# Allegro board Node1.brd
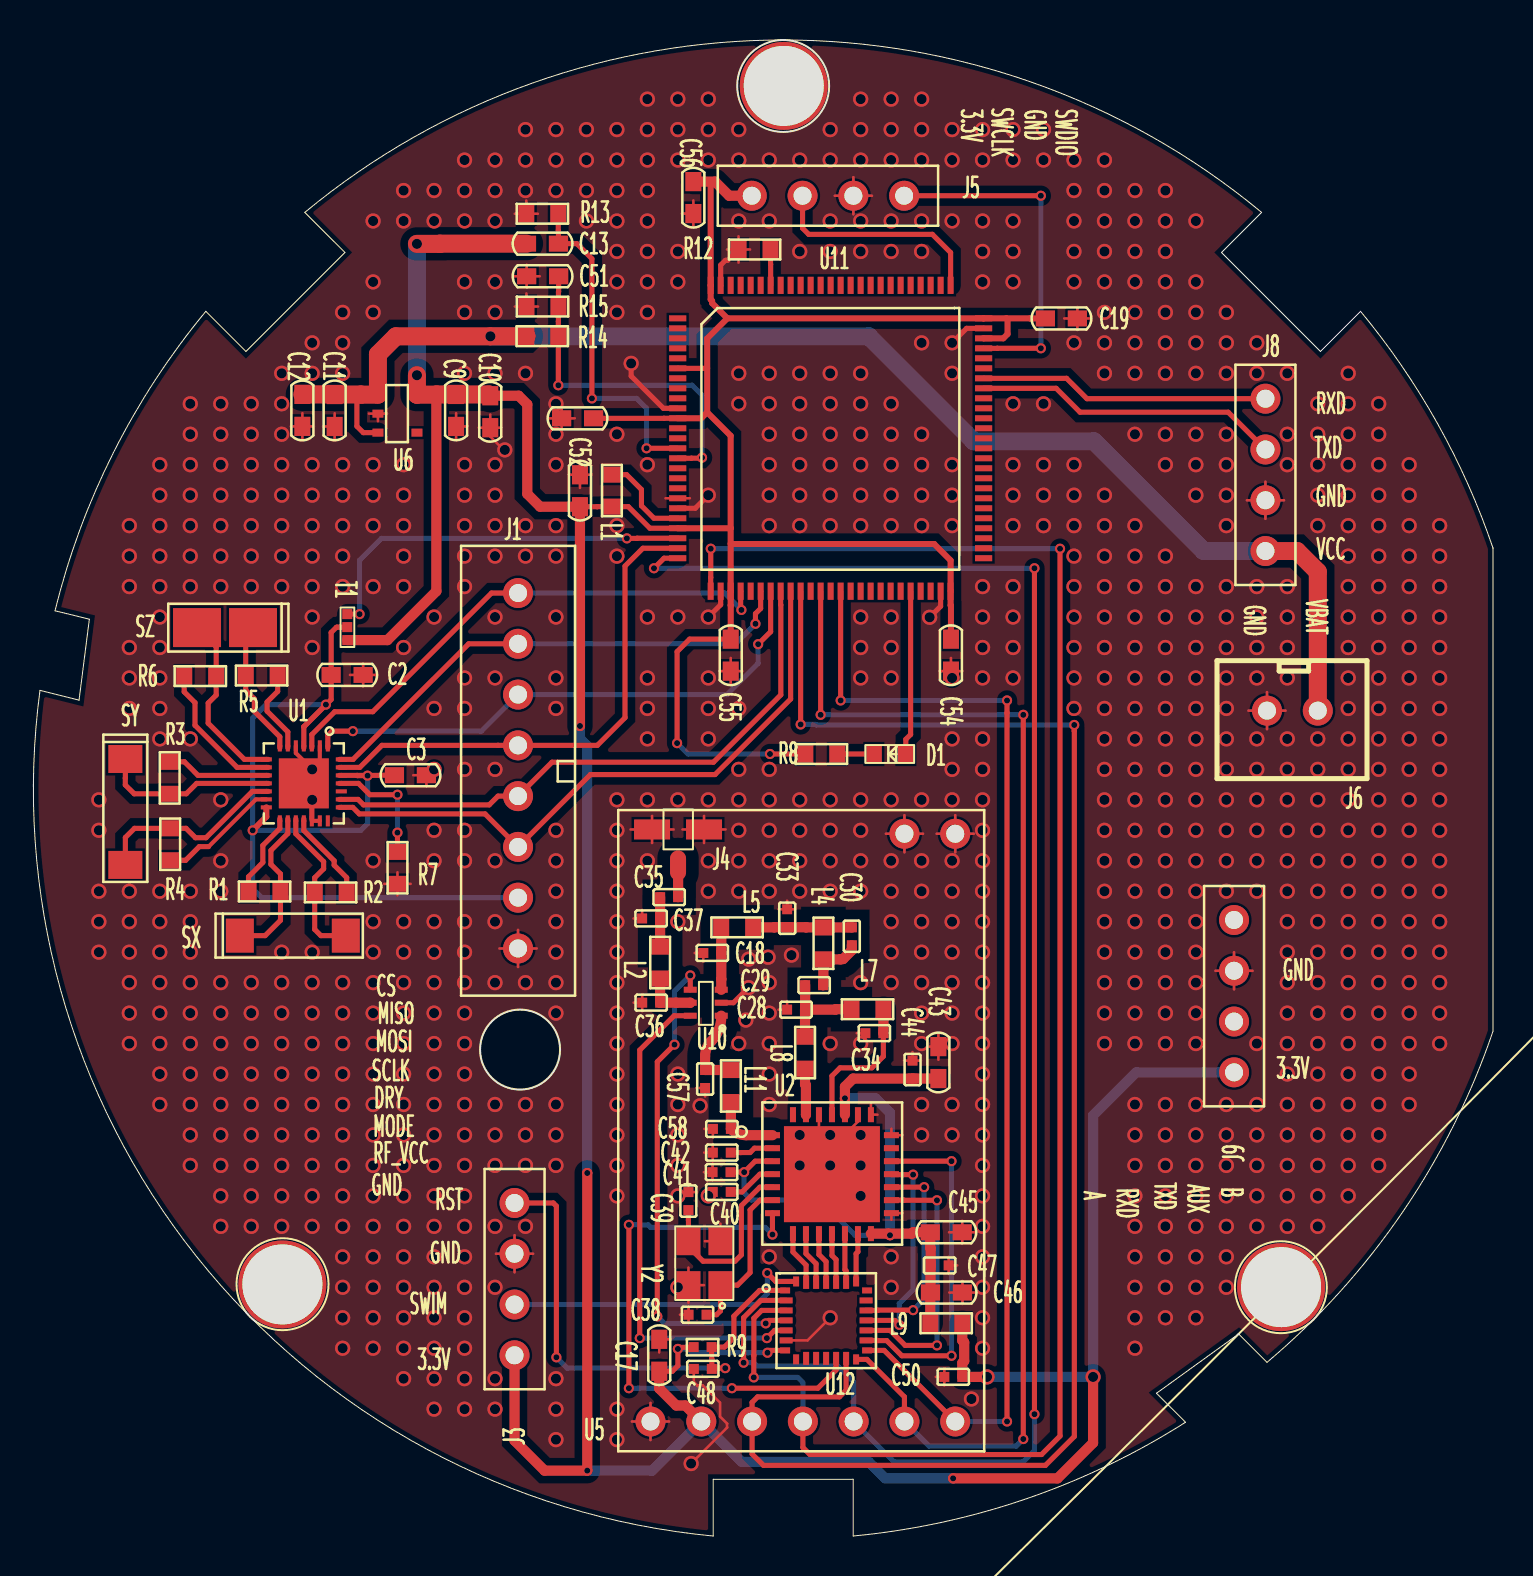
[diagram p0: board, top side]
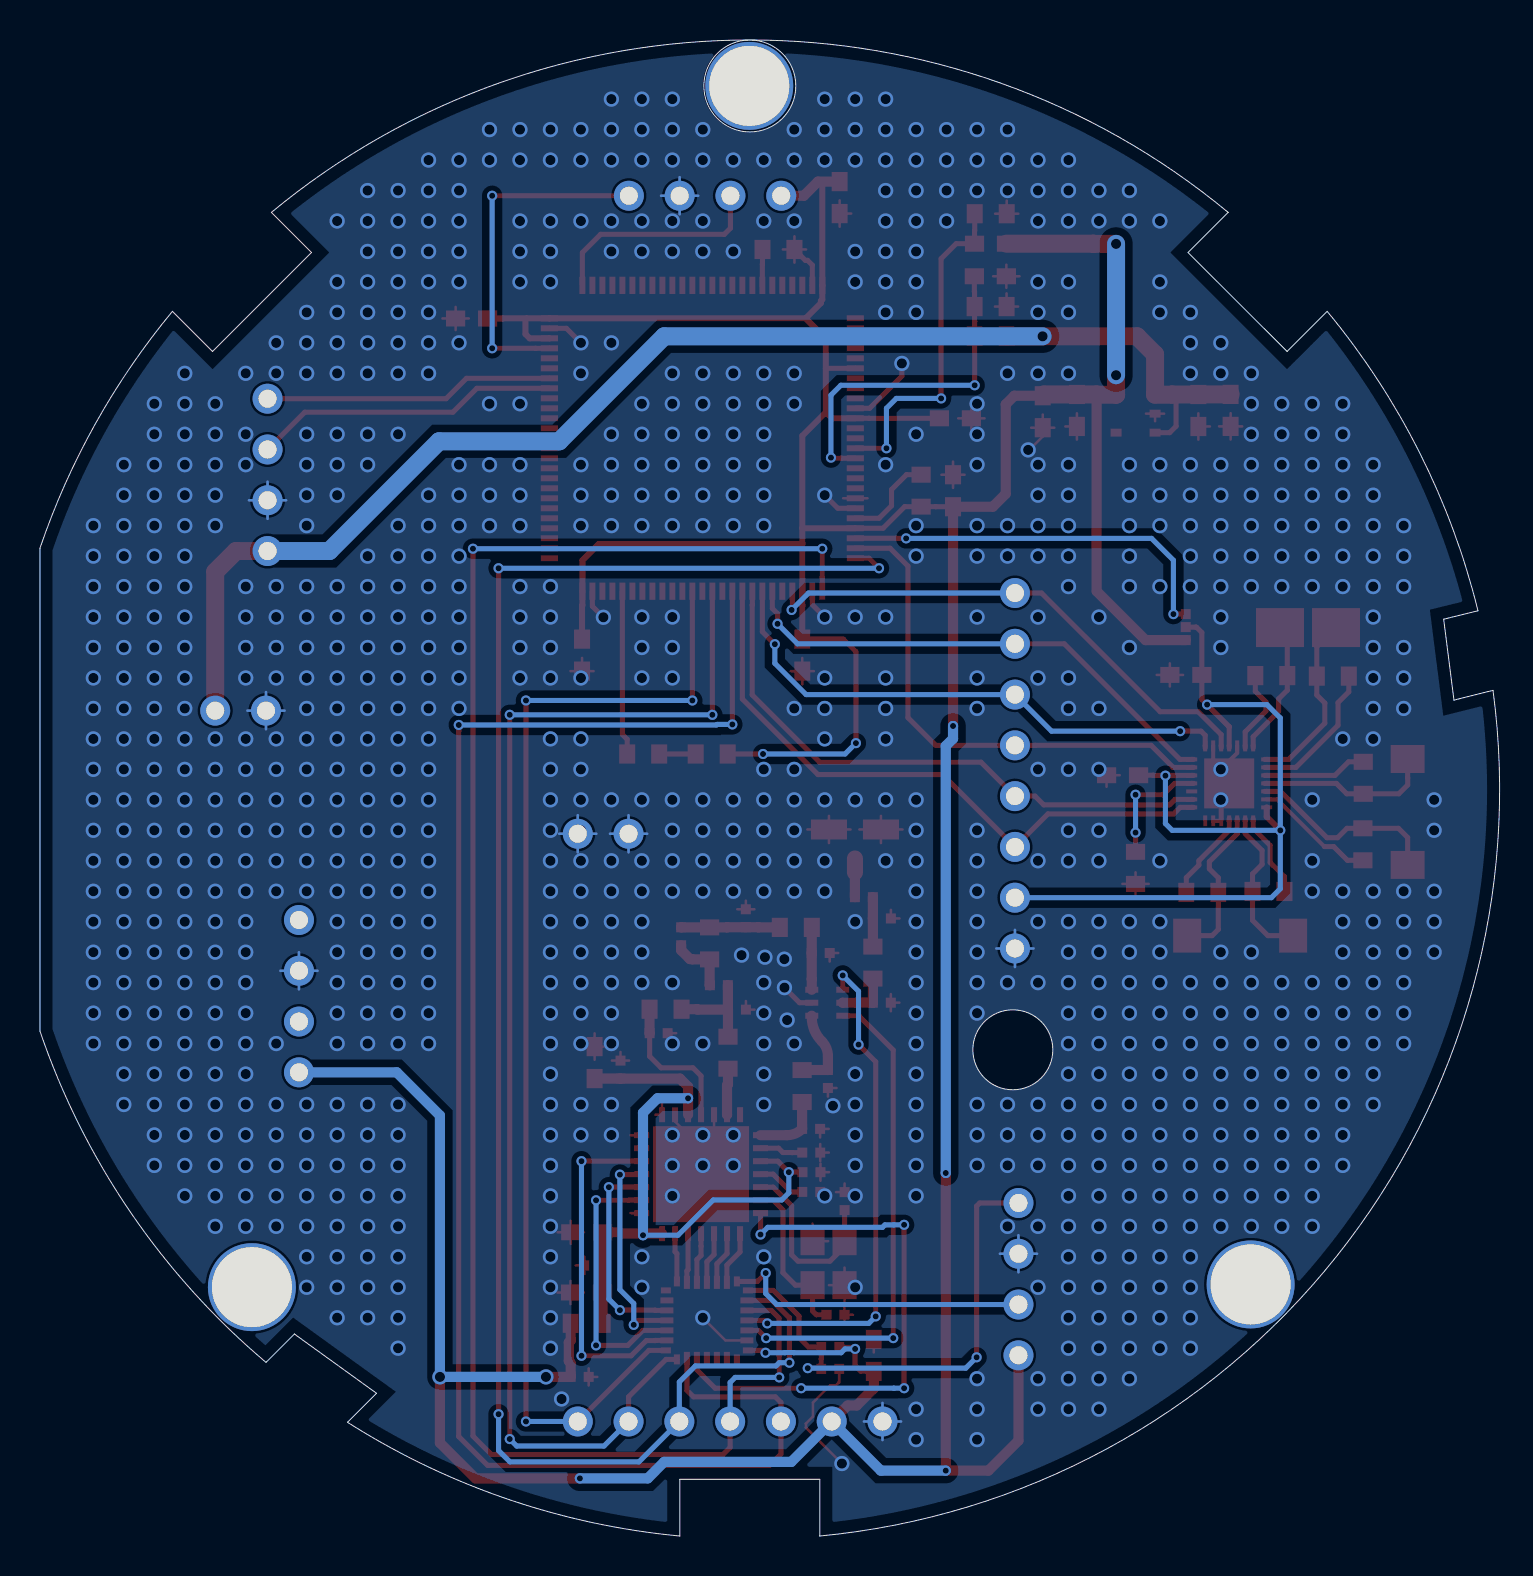
[diagram p1: board, bottom side, seen from below]

Outline 73 x 74.84 mm; copper layers: TOP, BOTTOM. Coordinates in mm from the lower left corner of the outline.
Outline path: circle c24.34,24.32 r2 ; circle c37.5,72.54 r2.3 ; 1.08,46.28 2.8,45.86 2.28,41.81 0.33,42.3 arc(8.16,13.98) 34,0 34,2.84 41,2.84 41,0 arc(49.65,1.86) 57.62,5.69 56.17,7.14 60.28,10.11 61.7,8.69 arc(68.48,16.2) 73,25.25 73,49.42 arc(70.23,55.64) 66.38,61.26 64.37,59.26 59.42,64.21 61.43,66.21 arc(37.5,74.84) 13.57,66.21 15.58,64.21 10.63,59.26 8.62,61.26 arc(4.01,54.2) 1.08,46.28

## Design rules (mm)
net group RF: nets N36094 N36478 N36502 N36552 N36576 N36664 N36842 N60733 N63203

## Placement (name value [footprint] x y rotation side)
C2  10uF/10V  [C0603]  16.49 43.07 180 top
C3  0.1uF/10V  [C0603]  19.66 38.06 180 top
C9  10uF/10V  [C0603]  21.14 57.1 270 top
C10  0.1uF/10V  [C0603]  22.85 55.44 90 top
C11  10uF/10V  [C0603]  15.07 57.1 270 top
C12  0.1uF/10V  [C0603]  13.45 55.51 90 top
C13  0.1uF/10V  [C0603]  26.26 64.65 180 top
C17  0.1uF/10V  [C0603]  31.3 9.84 270 top
C18  12p  [C0402]  33.5 29.16 0 top
C19  0.1uF/10V  [C0603]  52.21 60.91 180 top
C28  18P  [C0402]  38.59 26.33 180 top
C29  22p  [C0402]  38.6 27.55 0 top
C30  9p  [C0402]  40.93 29.55 90 top
C33  18P  [C0402]  37.7 31.35 270 top
C34  8.2P  [C0402]  41.61 25.15 0 top
C35  16pF  [C0402]  31.34 31.96 0 top
C36  51pF  [C0402]  30.45 26.68 0 top
C37  12pF  [C0402]  30.44 30.89 0 top
C38  15P  [C0402]  33.67 11.07 180 top
C39  15P  [C0402]  32.76 16.3 90 top
C40  0.1uF  [C0402]  34.88 17.21 180 top
C41  0.1uF  [C0402]  33.97 18.2 0 top
C42  0.1uF  [C0402]  33.98 19.18 0 top
C43  10uF  [C0603]  45.26 24.48 270 top
C44  0.1uF  [C0402]  43.97 23.78 270 top
C45  10uF  [C0603]  46.46 15.19 180 top
C46  10uF  [C0603]  46.47 12.18 180 top
C47  0.1uF  [C0402]  45.78 13.54 180 top
C48  47P  [C0402]  33.03 8.36 0 top
C50  0.1uF  [C0402]  45.56 7.96 0 top
C51  0.1uF/10V  [C0603]  24.67 63.02 0 top
C52  0.1uF/10V  [C0603]  27.34 53.09 270 top
C53  0.1uF/10V  [C0603]  26.42 55.91 0 top
C54  0.1uF/10V  [C0603]  45.89 43.27 90 top
C55  0.1uF/10V  [C0603]  34.88 43.26 90 top
C56  0.1uF/10V  [C0603]  33.01 66.15 90 top
C57  8.2P  [C0402]  33.59 23.31 270 top
C58  8.2P  [C0402]  34.88 20.37 180 top
D1  F5F1  [LED0603]  43.63 39.12 180 top
J1  CON8  [CON_2_54_8P]  24.24 47.17 270 top
J3  -  [CON4]  24.06 9.04 90 top
J4  -  [IPX]  32.24 33.54 0 top
J5  -  [CON4]  35.93 67.04 0 top
J6  CON2  [XH_2_54_2P]  61.7 41.29 0 top
J8  -  [CON4]  61.62 56.89 270 top
J9  -  [CON4]  60.05 23.2 90 top
L1  600R@100MHz  [R0603]  28.93 51.49 90 top
L2  15nH  [R0603]  31.34 27.88 90 top
L4  12nH  [R0603]  39.51 28.84 90 top
L5  15nH  [R0603]  36 30.45 180 top
L7  47nH  [R0603]  40.91 26.35 0 top
L8  33nH  [R0603]  38.59 23.38 90 top
L9  33nH  [R0603]  46.46 10.64 180 top
L11  18nH  [R0603]  34.88 21.71 90 top
R1  120/1%  [R0603]  10.76 32.24 0 top
R2  120/1%  [R0603]  15.67 32.19 180 top
R3  120/1%  [R0603]  6.82 38.73 270 top
R4  120/1%  [R0603]  6.84 33.8 90 top
R5  120/1%  [R0603]  12.22 43.04 180 top
R6  120/1%  [R0603]  7.54 43.02 0 top
R7  33K/1%  [R0603]  18.21 32.62 90 top
R8  1K  [R0603]  38.61 39.12 0 top
R9  10K  [R0402]  33.92 9.45 180 top
R12  100K  [R0603]  35.27 64.36 0 top
R13  100K  [R0603]  24.65 66.15 0 top
R14  100K/1%  [R0603]  26.25 60.02 180 top
R15  100K/1%  [R0603]  24.66 61.5 0 top
SX  INDUCTOR  [SEN-XY-F]  12.98 30.03 0 top
SY  INDUCTOR  [SEN-XY-F]  4.6 36.22 270 top
SZ  INDUCTOR  [SEN-Z-F]  9.58 45.44 180 top
T1  tp_3  [TP3]  15.7 45.47 270 top
T2  TEST  [HOLE4_4X4_0]  37.53 72.54 0 top
T3  TEST  [HOLE4_4X4_0]  62.4 12.45 0 top
T4  TEST  [HOLE4_4X4_0]  12.45 12.59 0 top
U1  -  [13156]  13.53 37.65 270 top
U2  SX1278  [QFN28_LEAD]  35.33 19.81 0 top
U5  -  [APC340]  30.86 5.73 180 top
U6  XC6234H331VR-G/TPS780330200DDCT  [SOT23-5]  17.23 57.09 0 top
U10  PE4259  [SC-70]  34.4 26.03 180 top
U11  STM32L433VCT6  [LQFP-100]  39.87 54.91 0 top
U12  STM8L151G6U6  [QFN28_NOLEAD_0_5]  39.65 10.78 0 top
Y2  FTR5092-A2-32MHZ  [CRY_3225]  32.76 12.55 90 top

## Library data of the parts
C2 C3 C10 C12 C13 C17-C19 C28-C30 C33-C48 C50-C58 = CAP NP
C9 C11 = CAP POL
D1 = F5F1
J1 = CON8
J3 J5 J8 J9 = CON4
J4 = IPX
J6 = CON2
L1 L2 L4 L5 L7-L9 L11 SX SY SZ = INDUCTOR
R1-R7 R13-R15 = R
R8 R9 R12 = RESISTOR
T1 = tp_3
T2-T4 = TEST
U1 = 13156_0
U2 = SX1278
U5 = APC340
U6 = XC6234H331VR_0
U10 = PE4259
U11 = STM32L433VCT6
U12 = STM8L151G6U6
Y2 = CRY_0

## Footprints (pads in the part's own frame, mm; a bottom-side part is the same pattern mirrored in y, then rotated)
13156
  rect 0.55x0.2 smd: 1(-1.875,1.2) 2(-1.875,0.8) 3(-1.875,0.4) 4(-1.875,0) 5(-1.875,-0.4) 6(-1.875,-0.8) 7(-1.875,-1.2) 15(1.875,-1.2) 16(1.875,-0.8) 17(1.875,-0.4) 18(1.875,0) 19(1.875,0.4) 20(1.875,0.8) 21(1.875,1.2)
  rect 0.2x0.55 smd: 8(-1.2,-1.875) 9(-0.8,-1.875) 10(-0.4,-1.875) 11(0,-1.875) 12(0.4,-1.875) 13(0.8,-1.875) 14(1.2,-1.875) 22(1.2,1.875) 23(0.8,1.875) 24(0.4,1.875) 25(0,1.875) 26(-0.4,1.875) 27(-0.8,1.875) 28(-1.2,1.875)
  rect 2.5x2.5 smd: 29(0,0)
APC340
  round 1.5 hole 0.9: 1(0,0) 2(-2.54,0) 3(-5.08,0) 4(-7.62,0) 5(-10.16,0) 6(-12.7,0) 7(-15.24,0) 8(-15.24,-29.4) 9(-12.7,-29.4)
C0402
  rect 0.5x0.5 smd: 1(0,0) 2(0.9,0)
C0603
  rect 0.96x0.8 smd: 1(0,0) 2(1.6,0)
CON4
  round 1.5 hole 0.9: 1(0,0) 2(2.54,0) 3(5.08,0) 4(7.62,0)
CON_2_54_8P
  round 1.5 hole 0.9: 1(0,0) 2(2.54,0) 3(5.08,0) 4(7.62,0) 5(10.16,0) 6(12.7,0) 7(15.24,0) 8(17.78,0)
CRY_3225
  rect 1.4x1.2 smd: 1(0,-1.6) 2(2.2,-1.6) 3(2.2,0) 4(0,0)
HOLE4_4X4_0
  round 4.4 hole 4: 1(0,0)
IPX
  oval 0.8x1.5 smd: 1(0,0)
  rect 1.8x1 smd: 2(1.3,1.8) 3(-1.3,1.8)
LED0603
  rect 0.8x0.96 smd: 1(0,0) 2(1.6,0)
LQFP-100
  rect 0.86x0.3 smd: 1(-7.65,6) 2(-7.65,5.5) 3(-7.65,5) 4(-7.65,4.5) 5(-7.65,4) 6(-7.65,3.5) 7(-7.65,3) 8(-7.65,2.5) 9(-7.65,2) 10(-7.65,1.5) 11(-7.65,1) 12(-7.65,0.5) 13(-7.65,0) 14(-7.65,-0.5) 15(-7.65,-1) 16(-7.65,-1.5) 17(-7.65,-2) 18(-7.65,-2.5) 19(-7.65,-3) 20(-7.65,-3.5) 21(-7.65,-4) 22(-7.65,-4.5) 23(-7.65,-5) 24(-7.65,-5.5) 25(-7.65,-6) 51(7.65,-6) 52(7.65,-5.5) 53(7.65,-5) 54(7.65,-4.5) 55(7.65,-4) 56(7.65,-3.5) 57(7.65,-3) 58(7.65,-2.5) 59(7.65,-2) 60(7.65,-1.5) 61(7.65,-1) 62(7.65,-0.5) 63(7.65,0) 64(7.65,0.5) 65(7.65,1) 66(7.65,1.5) 67(7.65,2) 68(7.65,2.5) 69(7.65,3) 70(7.65,3.5) 71(7.65,4) 72(7.65,4.5) 73(7.65,5) 74(7.65,5.5) 75(7.65,6)
  rect 0.3x0.86 smd: 26(-6,-7.65) 27(-5.5,-7.65) 28(-5,-7.65) 29(-4.5,-7.65) 30(-4,-7.65) 31(-3.5,-7.65) 32(-3,-7.65) 33(-2.5,-7.65) 34(-2,-7.65) 35(-1.5,-7.65) 36(-1,-7.65) 37(-0.5,-7.65) 38(0,-7.65) 39(0.5,-7.65) 40(1,-7.65) 41(1.5,-7.65) 42(2,-7.65) 43(2.5,-7.65) 44(3,-7.65) 45(3.5,-7.65) 46(4,-7.65) 47(4.5,-7.65) 48(5,-7.65) 49(5.5,-7.65) 50(6,-7.65) 76(6,7.65) 77(5.5,7.65) 78(5,7.65) 79(4.5,7.65) 80(4,7.65) 81(3.5,7.65) 82(3,7.65) 83(2.5,7.65) 84(2,7.65) 85(1.5,7.65) 86(1,7.65) 87(0.5,7.65) 88(0,7.65) 89(-0.5,7.65) 90(-1,7.65) 91(-1.5,7.65) 92(-2,7.65) 93(-2.5,7.65) 94(-3,7.65) 95(-3.5,7.65) 96(-4,7.65) 97(-4.5,7.65) 98(-5,7.65) 99(-5.5,7.65) 100(-6,7.65)
QFN28_LEAD
  rect 0.75x0.3 smd: 1(1.633,0.237) 2(1.633,-0.413) 3(1.633,-1.063) 4(1.633,-1.713) 5(1.633,-2.363) 6(1.633,-3.013) 7(1.633,-3.663) 15(7.583,-3.663) 16(7.583,-3.013) 17(7.583,-2.363) 18(7.583,-1.713) 19(7.583,-1.063) 20(7.583,-0.413) 21(7.583,0.237)
  rect 0.3x0.75 smd: 8(2.658,-4.688) 9(3.308,-4.688) 10(3.958,-4.688) 11(4.608,-4.688) 12(5.258,-4.688) 13(5.908,-4.688) 14(6.558,-4.688) 22(6.558,1.262) 23(5.908,1.262) 24(5.258,1.262) 25(4.608,1.262) 26(3.958,1.262) 27(3.308,1.262) 28(2.658,1.262)
  rect 4.8x4.8 smd: 29(4.608,-1.713)
QFN28_NOLEAD_0_5
  rect 0.5x0.3 smd: 1(-2.05,1.5) 7(-2.05,-1.5) 15(2.05,-1.5) 21(2.05,1.5)
  rect 0.65x0.3 smd: 2(-2,1) 3(-2,0.5) 4(-2,0) 5(-2,-0.5) 6(-2,-1) 16(2,-1) 17(2,-0.5) 18(2,0) 19(2,0.5) 20(2,1)
  rect 0.3x0.5 smd: 8(-1.5,-1.95) 14(1.5,-1.95) 22(1.5,1.95) 28(-1.5,1.95)
  rect 0.3x0.65 smd: 9(-1,-1.9) 10(-0.5,-1.9) 11(0,-1.9) 12(0.5,-1.9) 13(1,-1.9) 23(1,1.9) 24(0.5,1.9) 25(0,1.9) 26(-0.5,1.9) 27(-1,1.9)
R0402
  rect 0.5x0.5 smd: 1(0,0) 2(0.9,0)
R0603
  rect 0.8x0.96 smd: 1(0,0) 2(1.6,0)
SC-70
  rect 0.65x0.3 smd: 1(0,0) 2(0,-0.65) 3(0,-1.3) 4(1.55,-1.3) 5(1.55,-0.65) 6(1.55,0)
SEN-XY-F
  rect 1.4x1.7 smd: 1(-2.65,0) 2(2.65,0)
SEN-Z-F
  rect 2.4x1.95 smd: 1(-1.4,0) 2(1.4,0)
SOT23-5
  rect 0.55x0.4 smd: 1(0,0) 2(0,-0.95) 3(0,-1.9) 4(1.95,-1.9) 5(1.95,0)
TP3
  rect 0.5x0.5 smd: 1(-0.65,0) 2(0,0) 3(0.65,0)
XH_2_54_2P
  round 1.5 hole 0.9: 1(0,0) 2(2.54,0)

## Nets
GND: C2.1 C3.1 C9.2 C10.1 C11.2 C12.1 C17.1 C18.1 C19.1 C28.2 C33.1 C34.1 C36.1 C37.1 C38.2 C39.2 C40.2 C41.1 C42.1 C43.1 C44.1 C45.1 C46.1 C47.1 C48.1 C50.1 C51.1 C52.1 C53.1 C54.1 C55.1 C56.1 C57.2 C58.2 J1.8 J3.3 J4.2(G#2) J4.3(G#3) J5.3 J6.1 J8.3 J9.3 R7.1 R12.1 R13.1 R15.1 U1.2(RES#2) U1.5(AVSS) U1.19(DVSS) U1.20(RES#20) U1.29(GND) U2.15(GND#15) U2.21(RFI_HF (GND)) U2.22(RFO_HF (GND)) U2.23(GND#23) U2.26(GND#26) U2.29(GROUND) U5.1(GND#1) U5.8(GND#8) U5.9(GND#9) U6.2(VSSS) U10.2(GND) U11.10(VSS#10) U11.19(VSSA) U11.20(VREF) U11.27(VSS#27) U11.49(VSS#49) U11.74(VSS#74) U11.99(VSS#99) U12.6(VSS1) Y2.2(G#2) Y2.4(G#4)
VBAT_ADC: C51.2 R14.1 R15.2 U11.15(PC0)
VCC: C11.1 C12.2 J6.2 J8.4 R14.2 U6.1(VIN) U6.3(CE)
VCC_3.3V: C9.1 C10.2 C13.2 C17.2 C19.2 C50.2 C52.2 C53.2 C54.2 C55.2 C56.2 J3.1 J5.1 J9.1 L1.1 L9.1 R8.1 R9.2 T1.3(S3#3) U5.2(VCC) U6.5(VOUT) U11.6(VBAT) U11.11(VDD#11) U11.22(VDDA) U11.28(VDD#28) U11.50(VDD#50) U11.73(VDDUSB) U11.75(VDD#75) U11.100(VDD#100) U12.7(VDD1)
VCC_RF: C41.2 C43.2 C44.2 C45.2 C46.2 C47.2 L9.2 U2.3(VBAT_ANA) U2.14(VBAT_DIG) U2.24(VBAT_RF)
VCC_RM: C2.2 C3.2 J1.7 T1.2(S3#2) U1.4(AVDD) U1.14(DVDD#14) U1.26(DVDD#26)
DIO0: U2.8(DIO0) U12.27(PC6)
DIO1: U2.9(DIO1/DCLK) U12.26(PC5)
DIO2: U2.10(DIO2/DATA) U12.25(PC4)
DIO3: U2.11(DIO3) U12.24(PC3)
DIO4: U2.12(DIO4) U12.23(PC2)
DIO5: U2.13(DIO5) U12.22(PC1)
LORA_A: U5.3(SET_A) U11.35(PB0) U12.13(PB1)
LORA_AUX: U5.6(AUX) U11.37(PB2) U12.14(PB2)
LORA_B: U5.7(SET_B) U11.39(PE8) U12.15(PB3)
LORA_RST: U2.7(NRESET) U12.12(PB0)
LORA_RXD: U5.4(RXD) U11.26(PA3) U12.3(PA3/UART1_RXD)
LORA_TXD: U5.5(TXD) U11.25(PA2) U12.2(PA2/UART1_TXD)
NC1: U1.21(NC1)
NC2: U1.24(NC2)
RM3100_MODE_EN: J1.6 U1.22(I2C) U11.34(PC5)
RM_CS: J1.1 U1.3(SSN) U11.29(PA4)
RM_DRY: J1.5 U1.23(DRDY) U11.33(PC4)
RM_MISO: J1.2 U1.28(MISO) U11.31(PA6)
RM_MOSI: J1.3 U1.1(MOSI) U11.32(PA7)
RM_POWER: T1.1(S1) U11.23(PA0)
RM_SCLK: J1.4 U1.27(SCLK) U11.24(PA1)
RST: C48.2 J3.4 R9.1 U12.1(NRST)
RXD: J8.1 U11.69(PA10)
RXEN: U10.4(CTRL) U12.4(PA4)
SCLK: J5.2 U11.76(PA14)
SPI_MISO: U2.17(MISO) U12.19(PB7/SPI_MISO)
SPI_MOSI: U2.18(MOSI) U12.18(PB6/SPI_MOSI)
SPI_NSS: U2.19(NSS) U12.16(PB4/SPI_NSS)
SPI_SCK: U2.16(SCK) U12.17(PB5/SPI_SCK)
SWDIO: J5.4 U11.72(PA13)
SWIM: J3.2 U12.28(PA0)
TXD: J8.2 U11.68(PA9)
TXEN: U10.6(VDD) U12.5(PA5)
N01396: R1.2 SX.1 U1.16(XINP)
N01588: R2.2 SX.2 U1.17(XINN)
N01671: R3.1 U1.10(YDRVP)
N01689: R3.2 SY.1 U1.11(YINP)
N01747: R4.1 U1.13(YDRVN)
N01751: R4.2 SY.2 U1.12(YINN)
N01826: R5.1 U1.6(ZDRVP)
N01832: R5.2 SZ.1 U1.7(ZINP)
N01841: R6.1 U1.9(ZDRVN)
N01859: R6.2 SZ.2 U1.8(ZINN)
N01987: R7.2 U1.25(REXT)
N0020614: R1.1 U1.15(XDRVP)
N0020617: R2.1 U1.18(XDRVN)
N36094: C58.1 L11.1 U2.1(RFI_LF)
N36478: C29.2 C30.1 L4.1
N36502: C30.2 C33.2 L4.2 L5.1
N36552: C18.2 L5.2 U10.3(RF2)
N36576: C28.1 C29.1 L7.1 L8.2
N36660: C34.2 L7.2 U2.25(VR_PA)
N36664: L8.1 U2.27(PA_BOOST)
N36842: C35.1 C37.2 L2.2
N36972: C38.1 U2.6(XTB) Y2.1(IN)
N36976: C39.1 U2.5(XTA) Y2.3(OUT)
N37028: C40.1 U2.4(VR_DIG)
N37188: C42.2 U2.2(VR_ANA)
N38925: U11.70(PA11)
N39346: L1.2 U11.21(VREF+)
N39977: R12.2 U11.94(PH3-BOOT0)
N40117: C13.1 R13.2 U11.14(NRST)
N60566: C36.2 L2.1 U10.5(RFC)
N60733: C35.2 J4.1(ANT)
N63203: C57.1 L11.2 U10.1(RF1)
N69894: D1.2(ANODE) R8.2
N3877695: D1.1(CATHODE) U11.46(PE15)

Pads without a net: J9 2 4; T2 1; T3 1; T4 1; U2 20 28; U6 4; U11 1 2 3 4 5 7 8 9 12 13 16 17 18 30 36 38 40 41 42 43 44 45 47 48 51 52 53 54 55 56 57 58 59 60 61 62 63 64 65 66 67 71 77 78 79 80 81 82 83 84 85 86 87 88 89 90 91 92 93 95 96 97 98; U12 8 9 10 11 20 21

## Via types
v1: diameter 0.508, hole 0.305, TOP to BOTTOM, 64 vias
v2: diameter 0.762, hole 0.508, TOP to BOTTOM, 921 vias

## Routing (per net, layer and track width the routed paths; a pad name or vN(x,y) marks a point on that pad's centre or on a via; arc(x,y) is an arc through that point)
GND: length 181.7
  TOP w0.127: 30.45,26.25 C36.1 ; C36.1 30.45,27.11 ; C36.1 30.02,26.68 ; 19,38.06 C3.1 19.66,37.48 ; J3.3 24.99,14.12 ; J3.3 24.06,13.19 ; J3.3 23.14,14.12 ; J3.3 24.06,15.05 ; 33.58,14.75 Y2.2 34.36,15.63 ; 30.94,34.67 J4.3 ; J4.3 29.86,35.34 ; J4.3 32.02,35.34 ; J4.3 30.94,36.02 ; 31.88,9.84 C17.1 31.3,9.18 ; U2.23 41.24,20.73 40.8,20.3 40.8,19.5 39.94,18.63 U2.29 39.28,18.76 39.28,20.3 39.29,20.31 U2.26 ; C41.1 33.97,18.63 ; C41.1 33.54,18.2 ; C41.1 33.97,17.77 ; J6.1 61.7,42.22 ; J6.1 60.77,41.29 ; J6.1 62.62,41.29 ; J6.1 61.7,40.36 ; 27.34,52.43 C52.1 ; C52.1 27.91,53.09 ; C52.1 27.34,53.75 ; C52.1 26.76,53.09 ; Y2.4 32.76,13.43 ; Y2.4 32.76,11.67 ; Y2.4 33.54,12.55 ; C39.2 33.19,17.2 ; C39.2 32.33,17.2 ; C39.2 32.76,17.63 ; C33.1 37.7,31.78 ; C33.1 37.27,31.35 ; C33.1 38.13,31.35 ; C47.1 46.2,13.54 ; C47.1 45.78,13.97 ; C47.1 45.78,13.11 ; C45.1 46.45,15.77 ; C45.1 46.45,14.62 ; C45.1 45.8,15.19 ; C45.1 47.11,15.19 ; 32.77,10.64 C38.2 ; C38.2 32.34,11.07 ; C38.2 32.77,11.5 ; J9.3 60.98,28.28 ; J9.3 60.05,29.2 ; J9.3 59.12,28.28 ; J9.3 60.05,27.35 ; 33.08,29.16 C18.1 33.5,28.74 ; U5.1 31.79,5.73 ; U5.1 30.86,6.66 ; U5.1 30.86,4.8 ; U5.1 29.94,5.73 ; 15.83,43.07 C2.1 ; C2.1 17.15,43.07 ; C2.1 16.49,42.5 ; C2.1 16.49,43.65 ; 14.49,55.5 C11.2 ; C11.2 15.07,56.16 ; C11.2 15.07,54.84 ; J5.3 41.94,67.04 ; J5.3 41.01,66.12 ; J5.3 40.08,67.04 ; J5.3 41.01,67.97 ; C50.1 45.56,8.39 ; C50.1 45.13,7.96 ; C50.1 45.56,7.53 ; 61.62,50.88 J8.3 ; J8.3 60.69,51.81 ; J8.3 62.55,51.81 ; J8.3 61.62,52.74 ; C12.1 13.45,56.17 ; C12.1 14.03,55.51 ; C12.1 13.45,54.85 ; C12.1 12.88,55.51 ; C51.1 24.67,63.59 ; C51.1 24.67,62.44 ; C51.1 25.33,63.02 ; C51.1 24.01,63.02 ; 33.2,7.54 33.48,7.54 34.34,6.67 34.34,5.98 34.7,5.62 34.69,5.61 34.69,5.43 34.7,5.43 v2(32.89,3.63) ; 33.2,7.54 33.07,7.67 33.03,7.67 C48.1 ; 33.2,7.54 33.2,7.49 ; 23.31,29.39 J1.8 ; J1.8 25.17,29.39 ; J1.8 24.24,30.32 ; J1.8 24.24,28.46 ; v2(39.85,10.92) 38.72,9.78 U12.6 ; U5.9 44.49,35.13 ; U5.9 42.64,35.13 ; U5.9 43.56,34.2 ; U5.9 43.56,36.06 ; C10.1 22.85,56.1 ; C10.1 22.27,55.44 ; C10.1 22.85,55 23.52,54.33 v2(23.58,54.33) ; C10.1 23.43,55.44 ; 30.44,31.32 C37.1 30.02,30.89 ; 33.59,21.98 C57.2 33.17,22.41 ; 26.42,55.33 C53.1 ; C53.1 26.42,56.49 ; C53.1 25.76,55.91 ; C53.1 27.08,55.91 ; 45.31,43.27 C54.1 ; C54.1 46.47,43.27 ; C54.1 45.89,43.92 ; 41.61,24.73 C34.1 41.18,25.15 ; 37.69,26.76 C28.2 37.27,26.33 ; 42.91,15.82 U2.15 43.47,16.15 ; 32.83,51.91 U11.19 31.62,51.91 ; 41.89,21.63 U2.22 42.22,21.08 ; 43.47,20.05 U2.21 42.91,20.38 ; 33.98,18.75 C42.1 ; C42.1 33.98,19.61 ; C42.1 33.55,19.18 ; 17.23,55.77 U6.2 ; U6.2 17.68,56.14 ; U6.2 16.78,56.14 ; 33.56,20.37 C58.2 33.98,19.94 ; C9.2 21.72,55.5 ; C9.2 21.14,54.85 ; C9.2 21.14,56.16 ; C44.1 44.39,23.78 ; C44.1 43.97,24.21 ; C44.1 43.54,23.78 ; R15.1 25.24,61.5 ; R15.1 24.66,62.16 ; R15.1 24.08,61.5 ; C46.1 46.47,12.76 ; C46.1 46.47,11.6 ; C46.1 47.12,12.18 ; C46.1 45.81,12.18 ; 33.01,65.5 C56.1 ; C56.1 32.43,66.15 ; C56.1 33.01,66.81 ; U5.8 47.03,35.13 ; U5.8 46.1,36.06 ; U5.8 45.18,35.13 ; U5.8 46.1,34.2 ; 35.27,63.7 R12.1 ; R12.1 34.69,64.36 ; R12.1 35.27,65.01 ; R12.1 35.84,64.36 ; J4.2 34.62,35.34 ; J4.2 33.54,34.67 ; J4.2 33.54,36.02 ; J4.2 32.46,35.34 ; 34.3,43.26 C55.1 ; C55.1 34.88,43.92 ; C55.1 34.88,42.61 ; C55.1 35.45,43.26 ; C43.1 45.84,24.48 ; C43.1 45.26,23.83 ; C43.1 45.26,25.14 ; C43.1 44.68,24.48 ; C19.1 52.87,60.91 ; C19.1 52.21,60.33 ; C19.1 51.55,60.91 ; C19.1 52.21,61.48 ; R13.1 25.23,66.15 ; R13.1 24.07,66.15 ; R13.1 24.65,66.8 ; 17.55,32.62 R7.1 ; R7.1 18.21,33.2 ; R7.1 18.87,32.62 ; R7.1 18.21,32.05
  TOP w0.203: U1.20 U1.19 13.92,35.87 ; U1.2 14.32,38.45 U1.29 ; v2(13.94,38.35) 13.12,39.17 U1.5 ; 13.92,36.81 v2(13.94,36.83)
  TOP w0.254: v2(33.75,52.07) 33.1,51.41 U11.20 ; v2(35.77,27.43) 35.01,26.68 U10.2 ; U11.74 46.67,60.41 v2(45.95,59.69) ; R12.1 34.72,63.81 34.61,63.81 34.37,63.57 34.37,62.56 U11.99 ; v2(29.9,58.66) 29.9,58.02 31.51,56.41 U11.10 ; U11.27 34.37,47.26 34.37,46.59 v2(33.75,45.97) ; U11.49 45.37,46.51 v2(44.82,45.96) ; 13.92,35.87 13.92,36.81
  BOTTOM w0.127: 61.62,50.88 J8.3 ; J8.3 60.69,51.81 ; J8.3 61.62,52.74 ; J8.3 62.55,51.81 ; 23.31,29.39 J1.8 ; J1.8 24.24,30.32 ; J1.8 24.24,28.46 ; J1.8 25.17,29.39 ; U5.9 43.56,36.06 ; U5.9 43.56,34.2 ; U5.9 42.64,35.13 ; U5.9 44.49,35.13 ; 24.06,13.19 J3.3 ; J3.3 24.99,14.12 ; J3.3 23.14,14.12 ; J3.3 24.06,15.05 ; 46.1,34.2 U5.8 ; U5.8 47.03,35.13 ; U5.8 45.18,35.13 ; U5.8 46.1,36.06 ; J5.3 41.01,67.97 ; J5.3 41.01,66.12 ; J5.3 40.08,67.04 ; J5.3 41.94,67.04 ; J9.3 60.98,28.28 ; J9.3 59.12,28.28 ; J9.3 60.05,27.35 ; J9.3 60.05,29.2 ; 29.94,5.73 U5.1 ; U5.1 30.86,4.8 ; U5.1 31.79,5.73 ; U5.1 30.86,6.66 ; J6.1 61.7,42.22 ; J6.1 62.62,41.29 ; J6.1 61.7,40.36 ; J6.1 60.77,41.29
  vias: v2(3.27,36.83) v2(3.27,35.3) v2(3.27,32.25) v2(3.27,30.73) v2(3.27,29.21) v2(4.8,50.54) v2(4.8,49.02) v2(4.8,47.49) v2(4.8,44.45) v2(4.8,42.92) v2(4.8,41.4) v2(4.8,32.25) v2(4.8,30.73) v2(4.8,29.21) v2(4.8,27.68) v2(4.8,26.16) v2(4.8,24.63) v2(6.32,53.59) v2(6.32,52.07) v2(6.32,50.54) v2(6.32,49.02) v2(6.32,47.49) v2(6.32,45.97) v2(6.32,44.45) v2(6.32,42.92) v2(6.32,41.4) v2(6.32,39.87) v2(6.32,32.25) v2(6.32,30.73) v2(6.32,29.21) v2(6.32,27.68) v2(6.32,26.16) v2(6.32,24.63) v2(6.32,23.11) v2(6.32,21.59) v2(7.85,56.64) v2(7.85,55.11) v2(7.85,53.59) v2(7.85,52.07) v2(7.85,50.54) v2(7.85,49.02) v2(7.85,47.49) v2(7.85,39.87) v2(7.85,32.25) v2(7.85,30.73) v2(7.85,29.21) v2(7.85,27.68) v2(7.85,26.16) v2(7.85,24.63) v2(7.85,23.11) v2(7.85,21.59) v2(7.85,20.06) v2(7.85,18.54) v2(9.37,56.64) v2(9.37,55.11) v2(9.37,53.59) v2(9.37,52.07) v2(9.37,50.54) v2(9.37,49.02) v2(9.37,47.49) v2(9.37,36.83) v2(9.37,33.78) v2(9.37,32.25) v2(9.37,27.68) v2(9.37,26.16) v2(9.37,24.63) v2(9.37,23.11) v2(9.37,21.59) v2(9.37,20.06) v2(9.37,18.54) v2(9.37,17.01) v2(9.37,15.49) v2(10.89,56.64) v2(10.89,55.11) v2(10.89,53.59) v2(10.89,52.07) v2(10.89,50.54) v2(10.89,49.02) v2(10.89,47.49) v2(10.89,27.68) v2(10.89,26.16) v2(10.89,24.63) v2(10.89,23.11) v2(10.89,21.59) v2(10.89,20.06) v2(10.89,18.54) v2(10.89,17.01) v2(10.89,15.49) v2(12.42,58.16) v2(12.42,56.64) v2(12.42,55.11) v2(12.42,53.59) v2(12.42,52.07) v2(12.42,50.54) v2(12.42,49.02) v2(12.42,47.49) v2(12.42,29.21) v2(12.42,27.68) v2(12.42,26.16) v2(12.42,24.63) v2(12.42,23.11) v2(12.42,21.59) v2(12.42,20.06) v2(12.42,18.54) v2(12.42,17.01) v2(12.42,15.49) v2(13.94,59.69) v2(13.94,58.16) v2(13.94,53.59) v2(13.94,52.07) v2(13.94,50.54) v2(13.94,49.02) v2(13.94,47.49) v2(13.94,45.97) v2(13.94,44.45) v2(13.94,29.21) v2(13.94,27.68) v2(13.94,26.16) v2(13.94,24.63) v2(13.94,23.11) v2(13.94,21.59) v2(13.94,20.06) v2(13.94,18.54) v2(13.94,17.01) v2(13.94,15.49) v2(15.47,61.21) v2(15.47,59.69) v2(15.47,58.16) v2(15.47,53.59) v2(15.47,52.07) v2(15.47,50.54) v2(15.47,49.02) v2(15.47,47.49) v2(15.47,27.68) v2(15.47,26.16) v2(15.47,24.63) v2(15.47,23.11) v2(15.47,21.59) v2(15.47,20.06) v2(15.47,18.54) v2(15.47,17.01) v2(15.47,15.49) v2(15.47,13.97) v2(15.47,12.44) v2(15.47,10.92) v2(15.47,9.39) v2(16.99,65.78) v2(16.99,62.73) v2(16.99,61.21) v2(16.99,53.59) v2(16.99,52.07) v2(16.99,50.54) v2(16.99,47.49) v2(16.99,33.78) v2(16.99,30.73) v2(16.99,29.21) v2(16.99,27.68) v2(16.99,26.16) v2(16.99,24.63) v2(16.99,23.11) v2(16.99,21.59) v2(16.99,20.06) v2(16.99,18.54) v2(16.99,17.01) v2(16.99,15.49) v2(16.99,13.97) v2(16.99,12.44) v2(16.99,10.92) v2(16.99,9.39) v2(18.51,67.31) v2(18.51,65.78) v2(18.51,53.59) v2(18.51,52.07) v2(18.51,50.54) v2(18.51,49.02) v2(18.51,47.49) v2(18.51,44.45) v2(18.51,30.73) v2(18.51,29.21) v2(18.51,27.68) v2(18.51,26.16) v2(18.51,24.63) v2(18.51,23.11) v2(18.51,21.59) v2(18.51,20.06) v2(18.51,18.54) v2(18.51,17.01) v2(18.51,15.49) v2(18.51,13.97) v2(18.51,12.44) v2(18.51,10.92) v2(18.51,9.39) v2(18.51,7.87) v2(20.04,67.31) v2(20.04,65.78) v2(20.04,45.97) v2(20.04,41.4) v2(20.04,38.35) v2(20.04,35.3) v2(20.04,33.78) v2(20.04,30.73) v2(20.04,29.21) v2(20.04,27.68) v2(20.04,26.16) v2(20.04,24.63) v2(20.04,23.11) v2(20.04,21.59) v2(20.04,20.06) v2(20.04,18.54) v2(20.04,17.01) v2(20.04,15.49) v2(20.04,13.97) v2(20.04,12.44) v2(20.04,10.92) v2(20.04,9.39) v2(20.04,7.87) v2(20.04,6.35) v2(21.56,68.83) v2(21.56,67.31) v2(21.56,65.78) v2(21.56,62.73) v2(21.56,61.21) v2(21.56,58.16) v2(21.56,53.59) v2(21.56,52.07) v2(21.56,50.54) v2(21.56,49.02) v2(21.56,47.49) v2(21.56,42.92) v2(21.56,41.4) v2(21.56,38.35) v2(21.56,35.3) v2(21.56,33.78) v2(21.56,30.73) v2(21.56,29.21) v2(21.56,27.68) v2(21.56,26.16) v2(21.56,24.63) v2(21.56,23.11) v2(21.56,21.59) v2(21.56,20.06) v2(21.56,18.54) v2(21.56,17.01) v2(21.56,15.49) v2(21.56,13.97) v2(21.56,12.44) v2(21.56,10.92) v2(21.56,9.39) v2(21.56,7.87) v2(21.56,6.35) v2(23.09,68.83) v2(23.09,67.31) v2(23.09,65.78) v2(23.09,62.73) v2(23.09,61.21) v2(23.09,58.16) v2(23.09,53.59) v2(23.09,52.07) v2(23.09,50.54) v2(23.09,49.02) v2(23.09,45.97) v2(23.09,42.92) v2(23.09,38.35) v2(23.09,33.78) v2(23.09,30.73) v2(23.09,27.68) v2(23.09,21.59) v2(23.09,20.06) v2(23.09,18.54) v2(23.09,15.49) v2(23.09,12.44) v2(23.09,7.87) v2(23.09,6.35) v2(24.61,70.35) v2(24.61,68.83) v2(24.61,67.31) v2(24.61,58.16) v2(24.61,50.54) v2(24.61,49.02) v2(24.61,27.68) v2(24.61,21.59) v2(24.61,20.06) v2(24.61,18.54) v2(24.61,15.49) v2(26.13,70.35) v2(26.13,68.83) v2(26.13,67.31) v2(26.13,56.64) v2(26.13,55.11) v2(26.13,53.59) v2(26.13,50.54) v2(26.13,49.02) v2(26.13,45.97) v2(26.13,42.92) v2(26.13,41.4) v2(26.13,35.3) v2(26.13,33.78) v2(26.13,32.25) v2(26.13,30.73) v2(26.13,29.21) v2(26.13,27.68) v2(26.13,26.16) v2(26.13,21.59) v2(26.13,20.06) v2(26.13,18.54) v2(26.13,7.87) v2(26.13,6.35) v2(26.13,4.82) v2(27.66,70.35) v2(27.66,68.83) v2(27.66,67.31) v2(27.66,65.78) v2(29.18,70.35) v2(29.18,68.83) v2(29.18,67.31) v2(29.18,65.78) v2(29.18,64.26) v2(29.18,62.73) v2(29.18,61.21) v2(29.18,55.11) v2(29.18,50.54) v2(29.18,49.02) v2(29.18,36.83) v2(29.18,35.3) v2(29.18,33.78) v2(29.18,32.25) v2(29.18,30.73) v2(29.18,29.21) v2(29.18,27.68) v2(29.18,26.16) v2(29.18,24.63) v2(29.18,23.11) v2(29.18,21.59) v2(29.18,20.06) v2(29.18,18.54) v2(29.18,17.01) v2(29.18,6.35) v2(29.18,4.82) v2(30.71,71.88) v2(30.71,70.35) v2(30.71,68.83) v2(30.71,67.31) v2(30.71,65.78) v2(30.71,64.26) v2(30.71,62.73) v2(30.71,61.21) v2(30.71,53.59) v2(30.71,45.97) v2(30.71,42.92) v2(30.71,41.4) v2(30.71,39.87) v2(30.71,36.83) v2(30.71,33.78) v2(32.23,71.88) v2(32.23,70.35) v2(32.23,68.83) v2(32.23,64.26) v2(32.23,62.73) v2(32.23,45.97) v2(32.23,36.83) v2(32.23,30.73) v2(32.23,23.11) v2(32.23,21.59) v2(32.23,20.06) v2(32.23,18.54) v2(32.23,17.01) v2(32.23,12.44) v2(33.34,21.52) v2(33.75,71.88) v2(33.75,70.35) v2(33.75,68.83) v2(33.75,42.92) v2(33.75,41.4) v2(33.75,39.87) v2(33.75,36.83) v2(33.75,33.78) v2(33.75,32.25) v2(33.75,17.01) v2(35.28,70.35) v2(35.28,68.83) v2(35.28,65.78) v2(35.28,58.16) v2(35.28,56.64) v2(35.28,41.4) v2(35.28,38.35) v2(35.28,36.83) v2(35.28,35.3) v2(35.28,33.78) v2(35.28,32.25) v2(35.28,24.63) v2(35.63,25.81) v2(35.77,28.86) v2(36.74,28.95) v2(36.8,68.83) v2(36.8,65.78) v2(36.8,58.16) v2(36.8,56.64) v2(36.8,55.11) v2(36.8,53.59) v2(36.8,52.07) v2(36.8,50.54) v2(36.8,38.35) v2(36.8,36.83) v2(36.8,35.3) v2(36.8,33.78) v2(36.8,32.25) v2(36.8,27.68) v2(36.8,26.16) v2(36.8,24.63) v2(36.8,23.11) v2(36.8,21.59) v2(36.8,13.97) v2(37.91,29.06) v2(38.33,68.83) v2(38.33,64.26) v2(38.33,58.16) v2(38.33,56.64) v2(38.33,55.11) v2(38.33,53.59) v2(38.33,52.07) v2(38.33,50.54) v2(38.33,36.83) v2(38.33,35.3) v2(38.33,33.78) v2(38.33,32.25) v2(38.33,20.06) v2(38.33,18.54) v2(39.85,70.35) v2(39.85,68.83) v2(39.85,65.78) v2(39.85,64.26) v2(39.85,58.16) v2(39.85,56.64) v2(39.85,55.11) v2(39.85,53.59) v2(39.85,52.07) v2(39.85,50.54) v2(39.85,36.83) v2(39.85,35.3) v2(39.85,33.78) v2(39.85,32.25) v2(39.85,24.63) v2(39.85,20.06) v2(39.85,18.54) v2(41.37,71.88) v2(41.37,70.35) v2(41.37,68.83) v2(41.37,65.78) v2(41.37,64.26) v2(41.37,58.16) v2(41.37,56.64) v2(41.37,55.11) v2(41.37,53.59) v2(41.37,52.07) v2(41.37,50.54) v2(41.37,45.97) v2(41.37,44.45) v2(41.37,42.92) v2(41.37,36.83) v2(41.37,35.3) v2(41.37,33.78) v2(41.37,32.25) v2(41.37,27.68) v2(41.37,24.63) v2(41.37,20.06) v2(41.37,18.54) v2(41.37,17.01) v2(42.9,71.88) v2(42.9,70.35) v2(42.9,68.83) v2(42.9,65.78) v2(42.9,64.26) v2(42.9,56.64) v2(42.9,55.11) v2(42.9,53.59) v2(42.9,52.07) v2(42.9,50.54) v2(42.9,45.97) v2(42.9,44.45) v2(42.9,42.92) v2(42.9,36.83) v2(42.9,33.78) v2(42.9,32.25) v2(42.9,30.73) v2(42.9,29.21) v2(42.9,27.68) v2(42.9,13.97) v2(42.9,12.44) v2(44.42,71.88) v2(44.42,70.35) v2(44.42,68.83) v2(44.42,65.78) v2(44.42,64.26) v2(44.42,59.69) v2(44.42,55.11) v2(44.42,53.59) v2(44.42,52.07) v2(44.42,50.54) v2(44.42,36.83) v2(44.42,33.78) v2(44.42,32.25) v2(44.42,30.73) v2(44.42,29.21) v2(44.42,27.68) v2(44.42,26.16) v2(44.42,24.63) v2(44.42,21.59) v2(44.42,20.06) v2(45.95,70.35) v2(45.95,68.83) v2(45.95,65.78) v2(45.95,58.16) v2(45.95,53.59) v2(45.95,52.07) v2(45.95,50.54) v2(45.95,42.92) v2(45.95,39.87) v2(45.95,38.35) v2(45.95,36.83) v2(45.95,35.3) v2(45.95,33.78) v2(45.95,32.25) v2(45.95,30.73) v2(45.95,29.21) v2(45.95,27.68) v2(45.95,26.16) v2(45.95,24.63) v2(45.95,21.59) v2(45.95,20.06) v2(46.91,6.85) v2(47.47,70.35) v2(47.47,68.83) v2(47.47,65.78) v2(47.47,64.26) v2(47.47,62.73) v2(47.47,47.49) v2(47.47,45.97) v2(47.47,44.45) v2(47.47,42.92) v2(47.47,39.87) v2(47.47,38.35) v2(47.47,36.83) v2(47.47,35.3) v2(47.47,33.78) v2(47.47,32.25) v2(47.47,30.73) v2(47.47,29.21) v2(47.47,27.68) v2(47.47,26.16) v2(47.47,24.63) v2(47.47,23.11) v2(47.47,21.59) v2(47.47,20.06) v2(47.47,18.54) v2(47.47,17.01) v2(47.47,15.49) v2(47.47,13.97) v2(47.47,12.44) v2(47.47,10.92) v2(47.47,9.39) v2(48.99,70.35) v2(48.99,68.83) v2(48.99,65.78) v2(48.99,64.26) v2(48.99,62.73) v2(48.99,56.64) v2(48.99,53.59) v2(48.99,52.07) v2(48.99,50.54) v2(48.99,47.49) v2(48.99,45.97) v2(48.99,44.45) v2(48.99,42.92) v2(50.52,70.35) v2(50.52,68.83) v2(50.52,56.64) v2(50.52,53.59) v2(50.52,52.07) v2(50.52,50.54) v2(52.04,68.83) v2(52.04,67.31) v2(52.04,65.78) v2(52.04,64.26) v2(52.04,62.73) v2(52.04,59.69) v2(52.04,53.59) v2(52.04,52.07) v2(52.04,50.54) v2(52.04,49.02) v2(52.04,47.49) v2(52.04,45.97) v2(52.04,44.45) v2(52.04,42.92) v2(52.04,41.4) v2(53.57,68.83) v2(53.57,67.31) v2(53.57,65.78) v2(53.57,64.26) v2(53.57,62.73) v2(53.57,61.21) v2(53.57,59.69) v2(53.57,58.16) v2(53.57,52.07) v2(53.57,50.54) v2(53.57,49.02) v2(53.57,47.49) v2(53.57,45.97) v2(53.57,44.45) v2(53.57,42.92) v2(53.57,41.4) v2(53.57,39.87) v2(53.57,38.35) v2(53.57,36.83) v2(53.57,35.3) v2(53.57,33.78) v2(53.57,32.25) v2(53.57,30.73) v2(53.57,29.21) v2(53.57,27.68) v2(53.57,26.16) v2(53.57,24.63) v2(55.09,67.31) v2(55.09,65.78) v2(55.09,64.26) v2(55.09,62.73) v2(55.09,61.21) v2(55.09,59.69) v2(55.09,58.16) v2(55.09,55.11) v2(55.09,50.54) v2(55.09,49.02) v2(55.09,47.49) v2(55.09,45.97) v2(55.09,44.45) v2(55.09,42.92) v2(55.09,41.4) v2(55.09,39.87) v2(55.09,38.35) v2(55.09,36.83) v2(55.09,35.3) v2(55.09,33.78) v2(55.09,32.25) v2(55.09,30.73) v2(55.09,29.21) v2(55.09,27.68) v2(55.09,26.16) v2(55.09,24.63) v2(55.09,21.59) v2(55.09,20.06) v2(55.09,18.54) v2(55.09,17.01) v2(55.09,15.49) v2(55.09,13.97) v2(55.09,12.44) v2(55.09,10.92) v2(55.09,9.39) v2(56.61,67.31) v2(56.61,65.78) v2(56.61,64.26) v2(56.61,62.73) v2(56.61,61.21) v2(56.61,59.69) v2(56.61,58.16) v2(56.61,55.11) v2(56.61,53.59) v2(56.61,49.02) v2(56.61,47.49) v2(56.61,45.97) v2(56.61,44.45) v2(56.61,42.92) v2(56.61,41.4) v2(56.61,39.87) v2(56.61,38.35) v2(56.61,36.83) v2(56.61,35.3) v2(56.61,33.78) v2(56.61,32.25) v2(56.61,30.73) v2(56.61,29.21) v2(56.61,27.68) v2(56.61,26.16) v2(56.61,24.63) v2(56.61,21.59) v2(56.61,20.06) v2(56.61,18.54) v2(56.61,17.01) v2(56.61,15.49) v2(56.61,13.97) v2(56.61,12.44) v2(56.61,10.92) v2(58.14,65.78) v2(58.14,62.73) v2(58.14,61.21) v2(58.14,59.69) v2(58.14,58.16) v2(58.14,55.11) v2(58.14,53.59) v2(58.14,52.07) v2(58.14,47.49) v2(58.14,45.97) v2(58.14,44.45) v2(58.14,42.92) v2(58.14,41.4) v2(58.14,39.87) v2(58.14,38.35) v2(58.14,36.83) v2(58.14,35.3) v2(58.14,33.78) v2(58.14,32.25) v2(58.14,30.73) v2(58.14,29.21) v2(58.14,27.68) v2(58.14,26.16) v2(58.14,24.63) v2(58.14,21.59) v2(58.14,20.06) v2(58.14,18.54) v2(58.14,17.01) v2(58.14,15.49) v2(58.14,13.97) v2(58.14,12.44) v2(58.14,10.92) v2(59.66,61.21) v2(59.66,59.69) v2(59.66,58.16) v2(59.66,55.11) v2(59.66,53.59) v2(59.66,52.07) v2(59.66,50.54) v2(59.66,47.49) v2(59.66,45.97) v2(59.66,44.45) v2(59.66,42.92) v2(59.66,41.4) v2(59.66,39.87) v2(59.66,38.35) v2(59.66,36.83) v2(59.66,35.3) v2(59.66,33.78) v2(59.66,32.25) v2(59.66,21.59) v2(59.66,20.06) v2(59.66,18.54) v2(59.66,17.01) v2(59.66,15.49) v2(59.66,13.97) v2(59.66,12.44) v2(61.19,59.69) v2(61.19,58.16) v2(61.19,47.49) v2(61.19,45.97) v2(61.19,44.45) v2(61.19,42.92) v2(61.19,39.87) v2(61.19,38.35) v2(61.19,36.83) v2(61.19,35.3) v2(61.19,33.78) v2(61.19,32.25) v2(61.19,24.63) v2(61.19,21.59) v2(61.19,20.06) v2(61.19,18.54) v2(61.19,17.01) v2(61.19,15.49) v2(62.71,58.16) v2(62.71,55.11) v2(62.71,53.59) v2(62.71,47.49) v2(62.71,45.97) v2(62.71,44.45) v2(62.71,42.92) v2(62.71,39.87) v2(62.71,38.35) v2(62.71,36.83) v2(62.71,35.3) v2(62.71,33.78) v2(62.71,32.25) v2(62.71,30.73) v2(62.71,29.21) v2(62.71,27.68) v2(62.71,26.16) v2(62.71,24.63) v2(62.71,23.11) v2(62.71,21.59) v2(62.71,20.06) v2(62.71,18.54) v2(62.71,17.01) v2(62.71,15.49) v2(64.23,56.64) v2(64.23,55.11) v2(64.23,53.59) v2(64.23,52.07) v2(64.23,50.54) v2(64.23,39.87) v2(64.23,38.35) v2(64.23,36.83) v2(64.23,35.3) v2(64.23,33.78) v2(64.23,32.25) v2(64.23,30.73) v2(64.23,29.21) v2(64.23,27.68) v2(64.23,26.16) v2(64.23,24.63) v2(64.23,23.11) v2(64.23,21.59) v2(64.23,20.06) v2(64.23,18.54) v2(64.23,17.01) v2(64.23,15.49) v2(65.76,58.16) v2(65.76,56.64) v2(65.76,55.11) v2(65.76,53.59) v2(65.76,52.07) v2(65.76,50.54) v2(65.76,49.02) v2(65.76,47.49) v2(65.76,45.97) v2(65.76,44.45) v2(65.76,42.92) v2(65.76,41.4) v2(65.76,39.87) v2(65.76,38.35) v2(65.76,36.83) v2(65.76,35.3) v2(65.76,33.78) v2(65.76,32.25) v2(65.76,30.73) v2(65.76,29.21) v2(65.76,27.68) v2(65.76,26.16) v2(65.76,24.63) v2(65.76,23.11) v2(65.76,21.59) v2(65.76,20.06) v2(65.76,18.54) v2(65.76,17.01) v2(67.28,56.64) v2(67.28,55.11) v2(67.28,53.59) v2(67.28,52.07) v2(67.28,50.54) v2(67.28,49.02) v2(67.28,47.49) v2(67.28,45.97) v2(67.28,44.45) v2(67.28,42.92) v2(67.28,41.4) v2(67.28,39.87) v2(67.28,38.35) v2(67.28,36.83) v2(67.28,35.3) v2(67.28,33.78) v2(67.28,32.25) v2(67.28,30.73) v2(67.28,29.21) v2(67.28,27.68) v2(67.28,26.16) v2(67.28,24.63) v2(67.28,23.11) v2(67.28,21.59) v2(67.28,20.06) v2(67.28,18.54) v2(68.81,53.59) v2(68.81,52.07) v2(68.81,50.54) v2(68.81,49.02) v2(68.81,47.49) v2(68.81,45.97) v2(68.81,44.45) v2(68.81,42.92) v2(68.81,41.4) v2(68.81,39.87) v2(68.81,38.35) v2(68.81,36.83) v2(68.81,35.3) v2(68.81,33.78) v2(68.81,32.25) v2(68.81,30.73) v2(68.81,29.21) v2(68.81,27.68) v2(68.81,26.16) v2(68.81,24.63) v2(68.81,23.11) v2(68.81,21.59) v2(70.33,50.54) v2(70.33,49.02) v2(70.33,47.49) v2(70.33,45.97) v2(70.33,44.45) v2(70.33,42.92) v2(70.33,41.4) v2(70.33,39.87) v2(70.33,38.35) v2(70.33,36.83) v2(70.33,35.3) v2(70.33,33.78) v2(70.33,32.25) v2(70.33,30.73) v2(70.33,29.21) v2(70.33,27.68) v2(70.33,26.16) v2(70.33,24.63)
VBAT_ADC: length 17.2
  TOP w0.254: v1(26.25,57.56) R14.1 26.25,60.76 26.26,60.77 R15.2 26.26,62.24 26.27,62.25 C51.2 ; U11.15 32.91,53.91 32.91,53.92 33.41,53.92 v1(33.44,53.94)
  BOTTOM w0.254: v1(26.25,57.56) 32.95,57.56 33.44,57.07 v1(33.44,53.94)
VCC: length 69.7
  TOP w0.254: 16.38,57.09 16.18,56.9 16.18,55.51 16.5,55.19 U6.3
  TOP w0.9: C12.2 15.06,57.11 C11.1 16.37,57.1 16.38,57.09 U6.1 17.23,59.11 18.13,60.01 v2(22.86,60.01) 24.65,60.01 R14.2 ; J8.4 63.2,49.27 64.24,48.23 J6.2
  BOTTOM w0.9: J8.4 58.53,49.27 53.04,54.76 47.03,54.76 41.78,60.01 v2(22.86,60.01)
VCC_3.3V: length 262.2
  TOP w0.254: U11.6 33.7,58.41 ; v1(36.71,9.17) 36.83,9.28 U12.7 ; R8.1 v1(36.84,39.12) ; R9.2 33.01,9.44 32.31,9.44 v1(32.23,9.36) 32.23,8.52 31.95,8.24 C17.2 ; C52.2 28.19,51.49 28.2,51.49 L1.1 29.75,51.49 30.83,50.41 U11.22 ; v1(32.19,39.66) 32.19,44.24 32.82,44.86 C55.2 ; C53.2 31.54,55.91 31.54,55.91 U11.11
  TOP w0.3: 34.87,49.64 34.89,49.63 45.05,49.63 45.87,48.8 U11.50 45.87,46.56 45.89,46.54 C54.2 ; 34.87,49.64 34.87,50.41 ; 34.87,49.64 34.87,47.26 ; 33.87,62.56 33.87,61.86 33.94,61.78 33.94,61.67 34.71,60.91 ; 33.87,62.56 33.87,67.54 34.09,67.75 ; 33.87,62.56 U11.100 33.87,62.56 ; 34.87,47.26 U11.28 34.87,47.26 ; 34.87,47.26 34.87,46.56 34.88,46.55 C55.2 ; 34.87,50.41 34.87,55.04 33.7,56.21 ; 34.87,50.41 U11.22 ; 33.7,56.21 33.7,59.9 34.71,60.91 ; 33.7,56.21 33.4,55.91 U11.11 ; 48.66,60.91 48.72,60.85 48.72,60.12 48.51,59.91 U11.73 ; 48.66,60.91 U11.75 34.71,60.91 ; 48.66,60.91 49.85,60.91 49.86,60.91 C19.2
  TOP w0.508: C17.2 31.3,7.38 32.15,6.53 32.6,6.53 U5.2 ; v2(53,7.96) 53,4.66 51.22,2.88 v1(46,2.88) ; v1(27.34,40.52) C52.2 25.34,51.49 24.7,52.13 24.7,56.61 24.27,57.04 C10.2 ; J5.1 34.8,67.04 34.09,67.75 C56.2 ; v1(27.7,18.16) v1(27.7,3.27) 25.56,3.27 24.06,4.77 J3.1 ; L9.1 46.45,9.78 46.55,9.68 46.55,8.75 46.46,8.66 C50.2 v2(47.7,7.96) ; 20.15,57.09 20.15,47.26 17.71,44.82 T1.3
  TOP w0.9: C13.2 20.32,64.65 20.31,64.64 v2(19.18,64.64) ; C10.2 22.79,57.1 C9.1 20.16,57.1 20.15,57.09 U6.5 v2(19.18,58.07)
  BOTTOM w0.254: v1(36.84,39.12) 32.74,39.12 v1(32.19,39.66) ; v1(32.23,9.36) 32.74,9.36 32.93,9.17 35.3,9.17 35.31,9.18 35.73,9.18 35.74,9.17 v1(36.72,9.17)
  BOTTOM w0.508: v1(27.7,18.16) 27.7,39.52 27.34,39.89 v1(27.34,40.52) ; v2(47.7,7.96) v2(53,7.96) 53,21.04 55.16,23.2 J9.1 ; v1(46,2.88) 42.6,2.88 41.78,3.71 35.43,3.71 U5.2 30.95,3.27 v1(27.7,3.27)
  BOTTOM w0.9: v2(19.18,58.07) v2(19.18,64.64)
VCC_RF: length 34.1
  TOP w0.254: C41.2 v1(35.55,18.2) 36.1,18.75 U2.3
  TOP w0.508: C43.2 43.97,22.88 C44.2 40.99,22.88 40.59,22.48 v1(40.59,21.9) U2.24 ; U2.14 42.76,15.13 ; 42.76,15.13 v1(42.84,15.05) ; 42.76,15.13 43.93,15.13 43.99,15.19 C45.2 44.86,14.41 44.88,14.39 C47.2 44.87,13.53 C46.2 44.85,12.17 L9.2
  BOTTOM w0.254: v1(42.84,15.05) 41.09,15.05 39.33,16.81 35.9,16.81 35.55,17.17 v1(35.55,18.2)
  BOTTOM w0.508: v1(42.84,15.05) 42.84,21.17 42.12,21.9 v1(40.59,21.9)
VCC_RM: length 47.8
  TOP w0.254: 15.3,38.05 U1.26 16.19,38.05 ; 13.52,39.42 U1.4 13.52,40.47 ; C3.2 17.32,38.06 17.31,38.05 16.19,38.05 ; 13.52,40.47 13.52,40.49 v1(14.63,41.59) ; 13.52,40.47 14.89,41.84 C2.2 14.89,45.2 15.15,45.46 15.18,45.46 15.19,45.47 T1.2 ; 16.19,38.05 16.21,38.04 v1(16.71,38.04)
  TOP w0.3: v1(10.97,35.3) 11.65,35.98 U1.14
  BOTTOM w0.254: v1(10.97,35.3) 10.97,40.92 11.64,41.59 v1(14.63,41.59) ; v1(10.97,35.3) 10.97,32.38 11.42,31.93 J1.7 ; v1(10.97,35.3) 16.37,35.3 16.71,35.64 v1(16.71,38.04)
DIO0: length 2.7
  TOP w0.254: U12.27 38.65,13.55 37.99,14.21 U2.8
DIO1: length 2.7
  TOP w0.254: U2.9 38.64,14.13 39.15,13.62 U12.26
DIO2: length 2.6
  TOP w0.254: U2.10 39.29,14.08 39.65,13.72 U12.25
DIO3: length 2.5
  TOP w0.254: U12.24 40.15,13.83 39.94,14.03 39.94,14.5 U2.11
DIO4: length 2.5
  TOP w0.254: U12.23 40.65,13.26 40.59,13.32 U2.12
DIO5: length 2.4
  TOP w0.254: U12.22 41.15,14.13 41.24,14.22 U2.13
LORA_A: length 82
  TOP w0.254: U11.35 v1(38.37,40.6) ; v1(52.06,40.57) 52.06,40.27 52.06,40.26 52.06,4.98 50.61,3.53 36.51,3.53 35.94,4.1 U5.3 35.94,6.68 36.22,6.96 40.31,6.96 40.65,7.29 U12.13
  BOTTOM w0.254: v1(52.06,40.57) 39.16,40.57 39.14,40.6 v1(38.37,40.6)
LORA_AUX: length 63.6
  TOP w0.254: U11.37 v1(39.37,41.08) ; U5.6 43.56,6.96 41.69,8.83 U12.14 ; v1(49.51,4.85) v1(49.51,41.08)
  BOTTOM w0.254: v1(39.37,41.08) v1(49.51,41.08) ; U5.6 44.79,4.5 49.16,4.5 v1(49.51,4.85)
LORA_B: length 58.3
  TOP w0.254: v1(48.7,5.73) 48.7,41.18 v1(48.69,41.8) ; U11.39 v1(40.37,41.8) ; U5.7 42.55,9.28 U12.15
  BOTTOM w0.254: U5.7 v1(48.7,5.73) ; v1(40.37,41.8) v1(48.69,41.8)
LORA_RST: length 27.9
  TOP w0.254: v1(29.78,7.39) v1(29.78,15.57) ; v1(34.93,7.39) 39.23,7.39 40.15,8.31 U12.12 ; U2.7 v1(36.96,15.08)
  BOTTOM w0.254: v1(36.96,15.08) 36.6,15.44 30.87,15.44 30.74,15.56 30.3,15.56 30.29,15.57 v1(29.78,15.57) ; v1(34.93,7.39) 30.29,7.39 v1(29.78,7.39)
LORA_RXD: length 87.9
  TOP w0.254: U12.3 36.42,11.28 36.03,10.9 36.03,9.04 36.03,9.03 v1(36.03,7.93) ; U11.26 33.87,47.26 33.87,47.95 33.88,47.95 v1(33.88,49.39) ; U5.4 38.48,4.43 38.84,4.08 50.42,4.08 51.35,5 v1(51.35,49.39)
  BOTTOM w0.254: v1(36.03,7.93) 38.23,7.93 38.48,7.68 U5.4 ; v1(51.35,49.39) v1(33.88,49.39)
LORA_TXD: length 87.3
  TOP w0.254: U11.25 31.54,48.91 v1(31.04,48.41) ; U12.2 36.38,11.78 35.52,10.92 v1(35.52,8.67) ; v1(50.07,48.41) v1(50.07,6.1)
  BOTTOM w0.254: v1(35.52,8.67) 36.03,8.67 36.19,8.51 40.22,8.51 41.02,7.71 U5.5 43.04,3.71 49.5,3.71 50.07,4.28 v1(50.07,6.1) ; v1(31.04,48.41) v1(50.07,48.41)
RM3100_MODE_EN: length 31.8
  TOP w0.254: 15.3,36.45 U1.22 15.97,36.45 16.3,36.12 22.59,36.12 J1.6 27.86,38.09 34.09,38.09 37.87,41.87 U11.34
RM_CS: length 26.4
  TOP w0.254: U11.29 35.37,47.26 35.37,46.36 v1(35.41,46.33) ; 13.92,39.42 U1.3 13.92,40.09 15.07,41.23 16.97,41.23 22.91,47.17 J1.1
  BOTTOM w0.254: v1(35.41,46.33) 34.56,47.17 J1.1
RM_DRY: length 29.7
  TOP w0.254: U11.33 37.37,47.26 37.37,46.58 37.38,46.57 37.38,42.08 34.01,38.71 25.94,38.71 J1.5 23.23,37.01 22.8,36.57 16.51,36.57 16.23,36.85 U1.23 15.3,36.85
RM_MISO: length 25.4
  TOP w0.254: J1.2 21.77,44.63 15.99,38.85 U1.28 15.3,38.85 ; v1(36.11,45.63) 36.11,46.14 36.37,46.4 36.37,47.26 U11.31
  BOTTOM w0.254: J1.2 35.11,44.63 v1(36.11,45.63)
RM_MOSI: length 27.5
  TOP w0.254: 14.72,39.42 U1.1 14.72,40.05 14.93,40.26 v1(15.98,40.26) ; v1(36.25,44.61) 36.87,45.24 36.87,47.26 U11.32
  BOTTOM w0.254: v1(36.25,44.61) 36.25,43.66 34.68,42.09 J1.3 22.41,40.26 v1(15.98,40.26)
RM_POWER: length 19.7
  TOP w0.254: v1(29.68,49.91) 30.19,49.91 30.2,49.91 U11.23 ; T1.1 v1(16.31,46.12)
  BOTTOM w0.254: v1(29.68,49.91) 17.41,49.91 16.31,48.81 v1(16.31,46.12)
RM_SCLK: length 25.9
  TOP w0.254: 15.3,38.45 U1.27 16.33,38.45 17.43,39.55 23.23,39.55 J1.4 28.2,39.55 29.59,40.94 29.59,48.52 30.48,49.41 U11.24
RST: length 25.7
  TOP w0.254: v1(34.6,8.4) 33.97,8.4 C48.2 33.93,8.86 33.92,8.87 R9.1 34.56,9.45 35.03,9.93 35.03,11 36.32,12.28 U12.1 ; J3.4 26,16.66 26.16,16.51 v1(26.16,8.94)
  BOTTOM w0.254: v1(34.6,8.4) 26.7,8.4 v1(26.16,8.94)
RXD: length 14.5
  TOP w0.254: J8.1 52.69,56.89 51.67,57.91 U11.69
RXEN: length 25.1
  TOP w0.254: U12.4 36.77,10.78 v1(36.63,10.64) ; v1(31.2,10.99) 31.2,23.72 v1(32.06,24.58) ; U10.4 32.85,27.33 v1(32.85,28.04)
  BOTTOM w0.254: v1(32.06,24.58) 32.06,27.25 v1(32.85,28.04) ; v1(31.2,10.99) 31.55,10.64 v1(36.63,10.64)
SCLK: length 11.2
  TOP w0.254: J5.2 38.47,65.42 38.77,65.12 44.96,65.12 45.87,64.2 U11.76
SPI_MISO: length 10.4
  TOP w0.254: v1(44,11.3) 42.24,11.3 42.22,11.28 U12.19 ; U2.17 v1(44.55,17.45)
  BOTTOM w0.254: v1(44.55,17.45) 44.55,11.85 v1(44,11.3)
SPI_MOSI: length 10.6
  TOP w0.254: v1(44,18.08) 42.94,18.08 U2.18 ; U12.18 43.08,10.78 v1(43.3,10.56)
  BOTTOM w0.254: v1(43.31,10.56) 43.31,11.63 44,12.32 v1(44,18.08)
SPI_NSS: length 17.3
  TOP w0.254: U2.19 v1(45.92,18.75) ; v1(45.92,9.02) 43.43,9.02 42.68,9.77 42.24,9.77 42.22,9.78 U12.16
  BOTTOM w0.254: v1(45.92,18.75) v1(45.92,9.02)
SPI_SCK: length 13.4
  TOP w0.254: U2.16 43.54,16.8 43.55,16.8 v1(45.19,16.8) ; U12.17 42.85,10.28 43.6,9.54 v1(45.19,9.54)
  BOTTOM w0.254: v1(45.19,9.54) v1(45.19,16.8)
SWDIO: length 17.3
  TOP w0.254: J5.4 v1(50.39,67.04) ; v1(50.39,59.41) 48.21,59.41 48.21,59.41 U11.72
  BOTTOM w0.254: v1(50.39,67.04) v1(50.39,59.41)
SWIM: length 15.5
  TOP w0.254: v1(36.7,13.16) 37.12,12.74 U12.28
  BOTTOM w0.254: J3.2 36.15,11.58 36.7,12.13 v1(36.7,13.16)
TXD: length 15.4
  TOP w0.254: J8.2 59.75,56.22 52.35,56.22 51.15,57.41 U11.68
TXEN: length 25.1
  TOP w0.254: v1(36.68,9.9) 37.07,10.28 U12.5 ; v1(30.33,9.9) 30.33,24.31 32.04,26.03 U10.6
  BOTTOM w0.254: v1(36.68,9.9) v1(30.33,9.9)
N01396: length 8
  TOP w0.254: 12.72,35.87 U1.16 12.72,35.14 11.88,34.3 11.88,33.6 12.36,33.12 R1.2 12.36,30.8 11.59,30.03 SX.1
N01588: length 8
  TOP w0.254: SX.2 14.38,30.03 14.07,30.34 R2.2 14.07,32.93 14.52,33.38 14.52,33.73 13.13,35.13 U1.17 13.13,35.87
N01671: length 5.2
  TOP w0.254: R3.1 7.55,38.73 8.23,38.05 U1.10 11.75,38.05
N01689: length 8.9
  TOP w0.254: 11.75,37.65 U1.11 8.17,37.65 7.65,37.13 R3.2 5.04,37.13 4.6,37.57 4.6,37.91 4.6,37.92 SY.1
N01747: length 6.1
  TOP w0.203: U1.13 11.13,36.85 8.76,34.49
  TOP w0.254: R4.1 7.61,33.8 8.3,34.49 8.76,34.49
N01751: length 9.9
  TOP w0.254: 11.75,37.25 U1.12 10.95,37.25 8.63,34.93 8.1,34.93 7.63,35.4 R4.2 5.06,35.4 4.6,34.94 SY.2
N01826: length 4.3
  TOP w0.254: R5.1 12.22,42.25 11.69,41.72 11.69,41.26 12.72,40.23 U1.6 12.72,39.42
N01832: length 6.9
  TOP w0.254: 12.33,39.42 U1.7 12.33,39.98 11.05,41.25 11.05,41.87 10.62,42.31 R5.2 10.62,45.08 SZ.1
N01841: length 7.2
  TOP w0.254: 11.75,38.45 U1.9 10.19,38.45 8.08,40.56 8.08,41.69 7.54,42.23 R6.1
N01859: length 9.1
  TOP w0.254: 11.75,38.85 U1.8 10.55,38.85 8.74,40.66 8.74,41.67 9.14,42.07 R6.2 9.14,44.48 SZ.2
N01987: length 6
  TOP w0.254: v1(18.21,37.08) 16.82,37.08 16.26,37.65 U1.25 15.3,37.65 ; R7.2 v1(18.21,35.19)
  BOTTOM w0.254: v1(18.21,35.19) v1(18.21,37.08)
N0020614: length 4.3
  TOP w0.254: 12.32,35.87 U1.15 12.32,35.4 11.48,34.55 11.48,33.7 10.76,32.98 R1.1
N0020617: length 4.6
  TOP w0.254: R2.1 15.67,32.93 15.04,33.56 15.04,33.78 13.53,35.3 U1.18 13.53,35.87
N36094: length 3.5
  TOP w0.508: U2.1 35.64,20.05 arc(35.23,20.13) C58.1 L11.1
N36478: length 3.2
  TOP w0.508: C29.2 39.51,27.57 L4.1 40.37,28.84 40.39,28.86 40.5,28.86 40.93,29.3 C30.1
N36502: length 4.9
  TOP w0.508: L5.1 37.06,30.45 37.07,30.45 C33.2 38.64,30.45 38.65,30.44 L4.2 40.93,30.44 C30.2
N36552: length 3.1
  TOP w0.508: L5.2 34.4,30.44 C18.2 34.4,27.86 34.4,27.86 U10.3
N36576: length 4.9
  TOP w0.508: C29.1 38.6,26.33 C28.1 ; L8.2 38.59,26.33 C28.1 ; L7.1 40.13,26.35 40.11,26.33 C28.1
N36660: length 7.3
  TOP w0.254: C34.2 42.51,23.99 41.94,23.42 40.34,23.42 39.94,23.01 U2.25
  TOP w0.508: C34.2 42.51,25.16 L7.2
N36664: length 2.3
  TOP w0.508: L8.1 38.59,22.6 38.64,22.55 U2.27
N36842: length 2.5
  TOP w0.508: C35.1 31.34,30.89 C37.2 31.34,29.49 L2.2
N36972: length 8.3
  TOP w0.254: C38.1 34.17,11.07 34.36,11.26 Y2.1 35.22,12.55 35.84,13.18 35.84,16.31 36.33,16.8 U2.6
N36976: length 9.3
  TOP w0.254: U2.5 36.33,17.45 35.41,16.52 35.41,14.07 35.09,13.75 33.49,13.75 32.76,14.48 Y2.3 32.76,15.8 32.76,15.8 C39.1
N37028: length 2.5
  TOP w0.254: U2.4 36.33,18.1 35.45,17.21 C40.1
N37188: length 2.2
  TOP w0.254: C42.2 35.38,19.18 35.38,19.18 35.84,19.18 36.06,19.4 U2.2
N39346: length 4.7
  TOP w0.254: U11.21 31.04,50.91 30.41,51.54 30.41,52.35 29.67,53.09 L1.2
N39977: length 1.8
  TOP w0.254: U11.94 36.87,62.56 36.87,63.62 36.87,63.62 R12.2
N40117: length 17
  TOP w0.254: R13.2 26.25,65.31 26.26,65.3 C13.1 27.18,64.65 27.93,63.89 v1(27.93,56.91) ; v1(30.67,54.41) U11.14
  BOTTOM w0.254: v1(27.93,56.91) 30.17,56.91 30.67,56.41 v1(30.67,54.41)
N60566: length 2.7
  TOP w0.508: L2.1 31.34,26.68 C36.2 32.14,26.68 32.15,26.68 U10.5
N60733: length 1.6
  TOP w0.508: J4.1 32.24,33.54 C35.2
N63203: length 4.2
  TOP w0.508: U10.1 34.4,25.96 arc(34.27,25.3) 33.9,24.75 arc(33.67,24.41) 33.59,24.01 C57.1 34.88,23.31 L11.2
N69894: length 1.8
  TOP w0.254: R8.2 D1.2
N3877695: length 8.2
  TOP w0.254: D1.1 43.63,39.85 43.87,40.09 U11.46

## Copper pours and planes (outline as drawn; the poured copper is in the pictures)
GND on TOP: 10.63,58.9 15.94,64.21 13.95,66.19 37.5,74.58 61.05,66.19 59.06,64.21 64.37,58.9 66.36,60.88 70.06,55.42 72.75,49.38 72.75,25.3 68.32,16.42 61.71,9.03 60.3,10.44 55.78,7.17 57.22,5.74 49.55,2.09 41.25,0.28 41.25,3.09 33.75,3.09 33.75,0.28 8.36,14.14 0.55,41.99 2.5,41.5 3.08,46.05 1.39,46.47 4.23,54.07 8.64,60.88 ; 8 cut-outs
GND on BOTTOM: 2.82,41.03 3.49,46.34 1.85,46.74 4.55,53.89 8.67,60.33 10.63,58.37 16.47,64.21 14.51,66.16 37.5,74.21 60.49,66.16 58.53,64.21 64.37,58.37 66.33,60.33 69.82,55.08 72.37,49.32 72.37,25.36 68.09,16.75 61.73,9.54 60.34,10.93 55.21,7.22 56.62,5.81 49.4,2.44 41.63,0.69 41.63,3.46 33.37,3.46 33.37,0.69 8.65,14.37 0.87,41.52

## Text on the board
Ref Des/Silkscreen Top: GND | SCLK | MODE | RF_VCC | DRY | MOSI | CS | MISO | SWIM | 3.3V | RST | TXD | RXD | VCC | SWCLK | SWDIO | A | AUX | B | VBAT
NCLEGEND-1-2: FIGURE | SIZE | 12.0 | 20.0 | 35.429 | 35.433 | 157.48 | DRILL CHART: TOP to BOTTOM | ALL UNITS ARE IN MILS | PLATED | QTY | 64 | 923 | 2 | 33 | 3
